# Altium PCB Marvin_PCB_V2.PcbDoc
Units mm, origin at the board's own origin, x right, y up, seen from the top; angles counter-clockwise.
Board outline 72 x 82 mm, 2 copper layers (Top Layer, Bottom Layer); 41 components, 30 nets, 134 pads, 45 vias.
Unrouted connection lines stored in the file: 2.
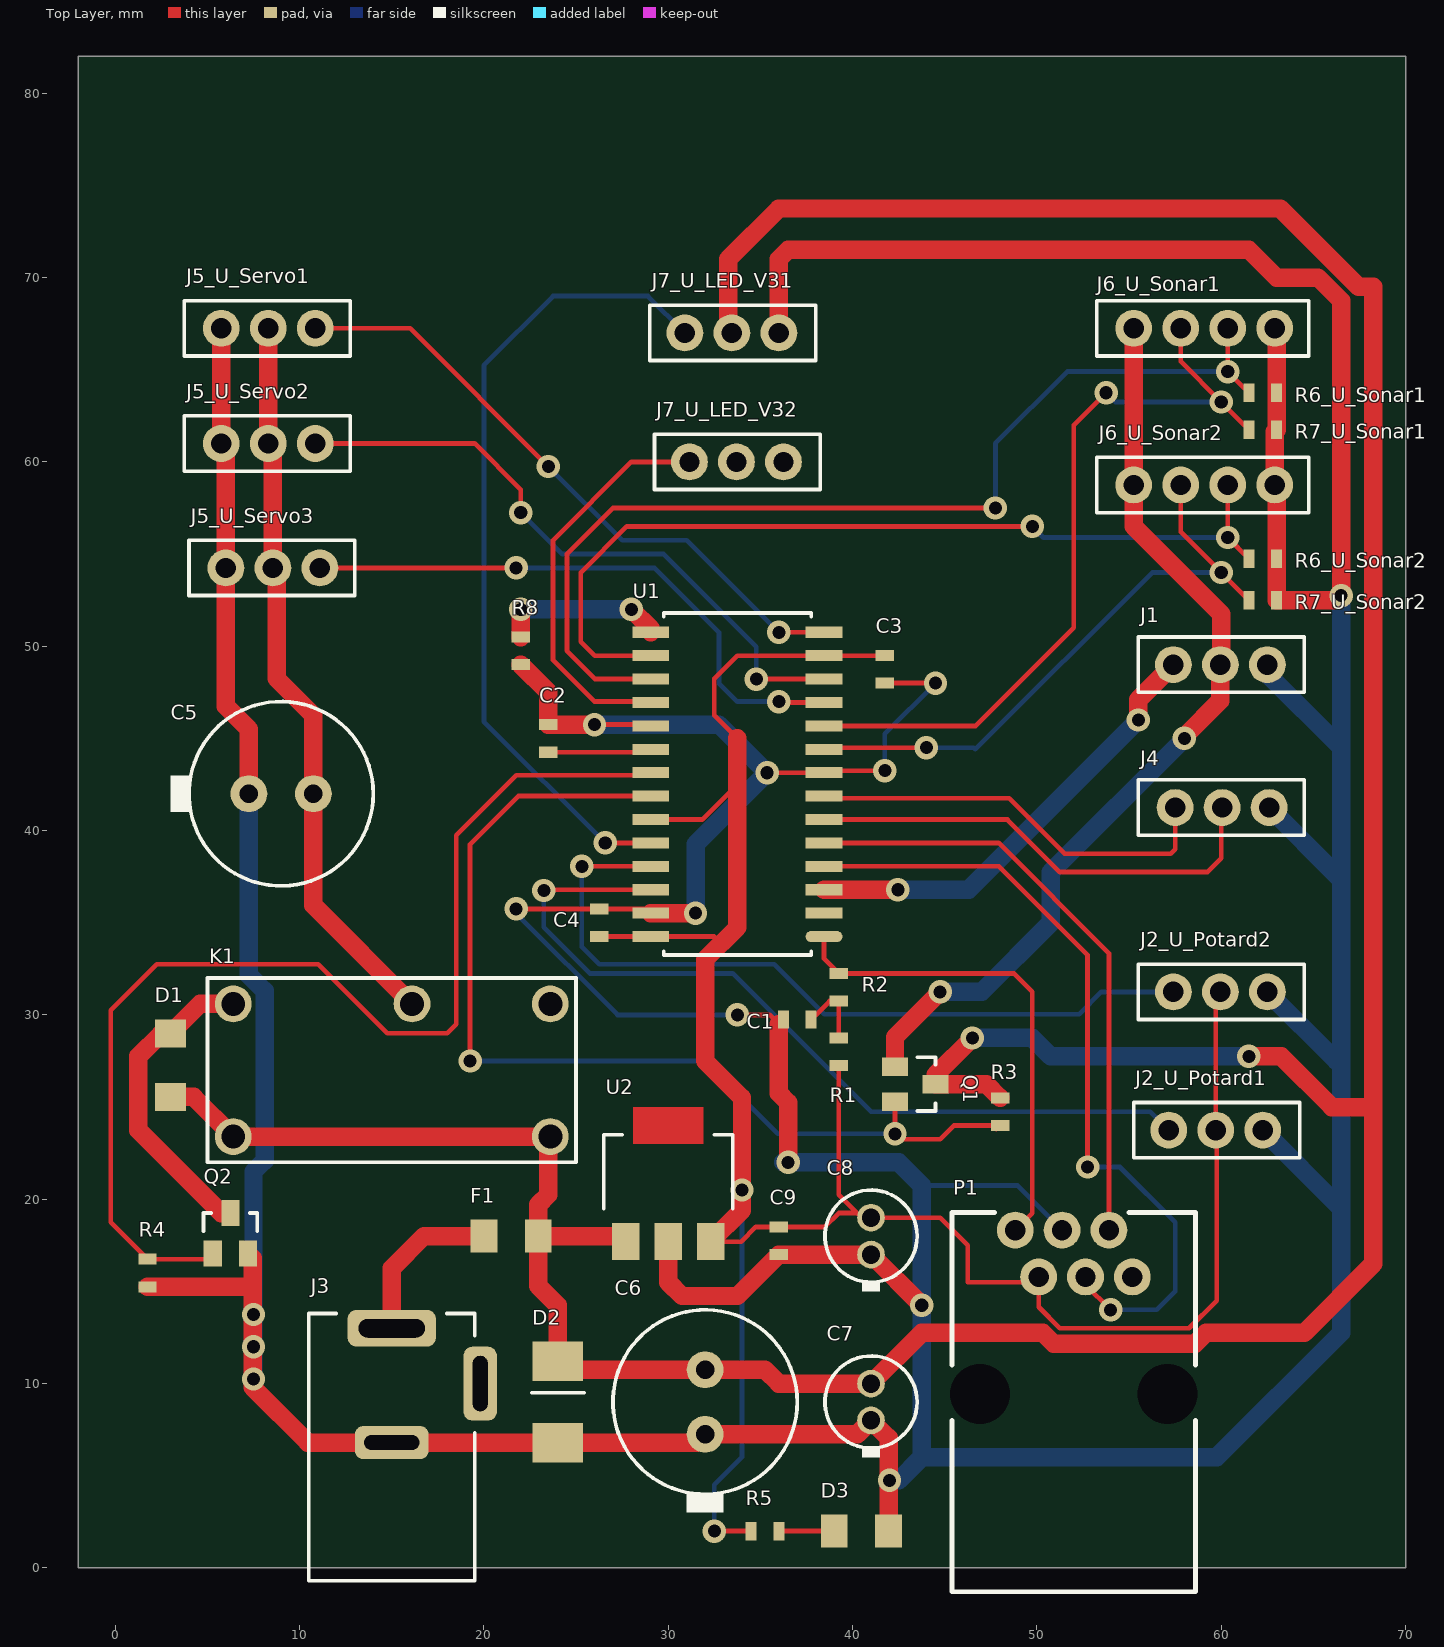
[diagram p0: Top Layer view]
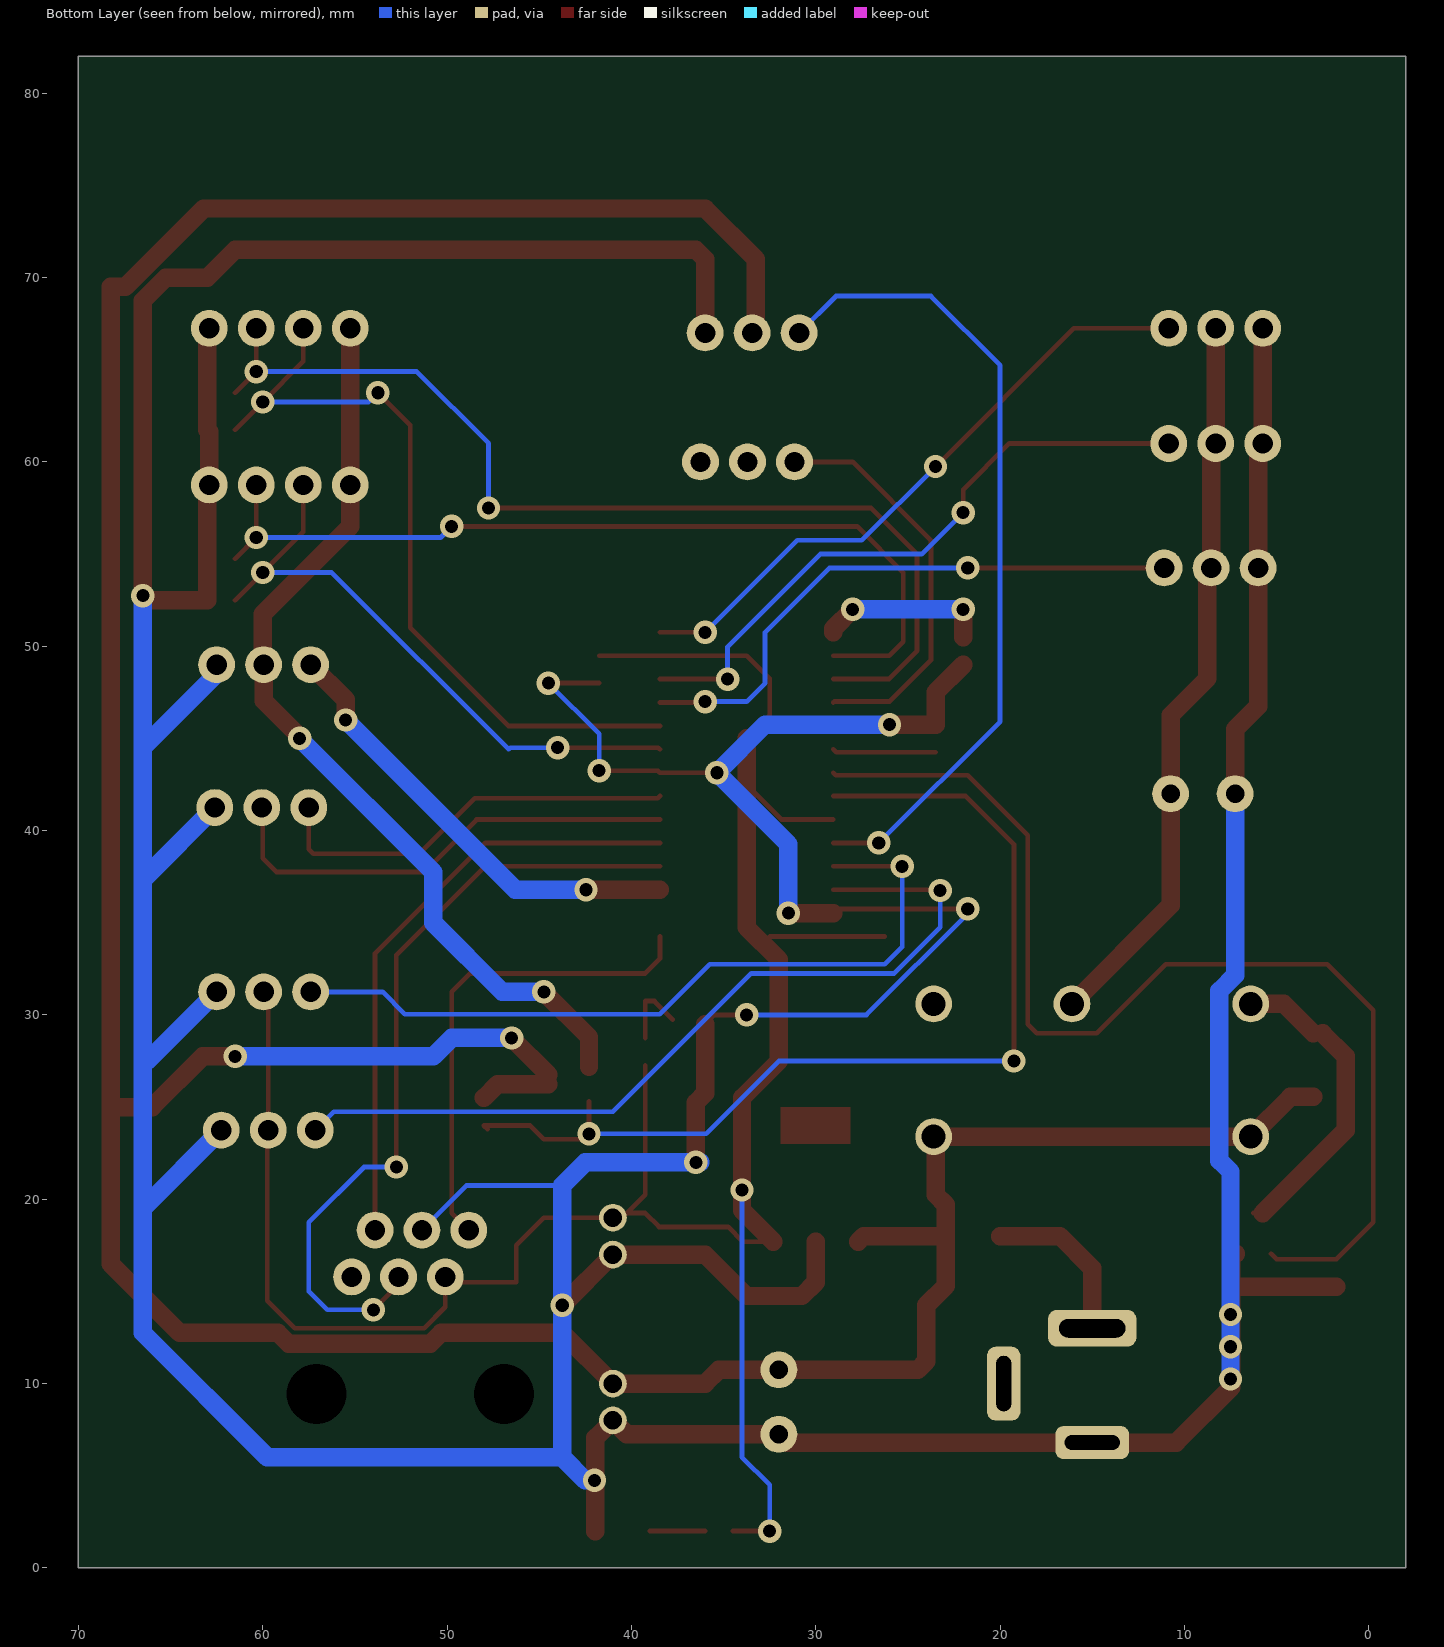
[diagram p1: Bottom Layer view, seen from below]

## Layer stack, top to bottom
Top Solder: solder mask 0.0102, Solder Resist, Dk 3.5
Top Layer: signal copper 0.0356
Dielectric 1: dielectric 0.32, FR-4, Dk 4.8
Bottom Layer: signal copper 0.0356
Bottom Solder: solder mask 0.0102, Solder Resist, Dk 3.5

## Board outline
-2,0 -2,82 70,82 70,0

## Design rules (kind name [scope] priority, off if disabled: settings)
Clearance [All] p1: gap=0.2
HoleSize [All] p1: absolutevalues=TRUE maxlimit=5 minlimit=0.3 maxpercent=80.000 minpercent=20.000
PolygonConnect [All] p1: connectstyle=Relief reliefconductorwidth=0.254 reliefentries=4 polygonreliefangle="90 Angle" airgapwidth=0.254
RoutingVias [All] p1: holewidth=0.3 width=0.7 viastyle="Through Hole" minholewidth=0.3 minwidth=0.7 maxholewidth=1 maxwidth=1.2
SolderMaskExpansion [All] p1: expansion=0.102
UnpouredPolygon [All] p1: allowunpoured=FALSE
Width [All] p1: maxlimit=5 minlimit=0.2 preferedwidth=0.2
28 further rules are at their usual default settings.

## Classes and differential pairs
channel class Sonar: U_Sonar1 U_Sonar2
channel class Servo: U_Servo1 U_Servo2 U_Servo3
channel class Potard: U_Potard1 U_Potard2
channel class LED_V3: U_LED_V31 U_LED_V32
component class U_Sonar2: J6_U_Sonar2 R6_U_Sonar2 R7_U_Sonar2
component class U_Sonar1: J6_U_Sonar1 R6_U_Sonar1 R7_U_Sonar1
component class U_Servo3: J5_U_Servo3
component class U_Servo2: J5_U_Servo2
component class U_Servo1: J5_U_Servo1
component class U_RPI: J4
component class U_Regul: C6 C7 C8 C9 D2 D3 F1 J3 R5 U2
component class U_Power_v2: C5 D1 K1 Q1 Q2 R3 R4
component class U_Potard2: J2_U_Potard2
component class U_Potard1: J2_U_Potard1
component class U_PIC: C1 C2 C3 C4 P1 R1 R2 R8 U1
component class U_LED_V32: J7_U_LED_V32
component class U_LED_V31: J7_U_LED_V31
component class U_IrSensor: J1

## Components (designator, comment, footprint, x,y, rotation, side; value= is the part's Value field where it differs from the comment)
C1 "100nF" "1608 / 0603" 36.25,29.75 r0 top
C2 "10uF" "1608 / 0603" 23.5,45.75 r270 top
C3 "100nF" "1608 / 0603" 41.75,48 r90 top
C4 "100nF" "1608 / 0603" 26.25,35.75 r270 top
C5 "470uF" CONDO_D_10mm 9,42 r270 top
C6 "470uF" CONDO_D_10mm 32,9 r0 top
C7 "10uF" CONDO_D_5MM 41,9 r0 top
C8 "10uF" CONDO_D_5MM 41,18 r0 top
C9 "Cap" "1608 / 0603" 36,17 r90 top
D1 "Diode GF1A" SMA/DO-214AC_21 3,29 r270 top
D2 "D Zener 1N5338BRLG" "DIODE ZENER" 24,9 r90 top
D3 "*" "3216 / 1206" 39,2 r0 top
F1 "MCPFP 5A 125V" "3216 / 1206" 20,18 r0 top
J1 "IR_Connector" "IR SENSOR CONNECTOR" 62.5,49 r180 top
J2_U_Potard1 "Potard_Connector" "POTARD CONNECTOR" 62.25,23.75 r180 top (schematic designator J2)
J2_U_Potard2 "Potard_Connector" "POTARD CONNECTOR" 62.5,31.25 r180 top (schematic designator J2)
J3 "PWR2.5" RAPC712BK 15,13 r0 top
J4 "RPi_Connector" "RPI CONNECTOR" 57.5,41.25 r0 top
J5_U_Servo1 "Servo_Connector" "SERVO CONNECTOR" 5.75,67.25 r0 top (schematic designator J5)
J5_U_Servo2 "Servo_Connector" "SERVO CONNECTOR" 5.75,61 r0 top (schematic designator J5)
J5_U_Servo3 "Servo_Connector" "SERVO CONNECTOR" 6,54.25 r0 top (schematic designator J5)
J6_U_Sonar1 "Sonar_Connector" "SONAR CONNECTOR" 55.25,67.25 r0 top (schematic designator J6)
J6_U_Sonar2 "Sonar_Connector" "SONAR CONNECTOR" 55.25,58.75 r0 top (schematic designator J6)
J7_U_LED_V31 "Leds_Connector" "LEDS CONNECTOR" 36,67 r180 top (schematic designator J7)
J7_U_LED_V32 "Leds_Connector" "LEDS CONNECTOR" 36.25,60 r180 top (schematic designator J7)
K1 "Relay-SPDT G5V-1" PE014005 15,27 r0 top
P1 "" RJ11 52,9 r180 top
Q1 "MOSFET-P ZVP2106A" SOT23 44.5,26.25 r270 top
Q2 "MOSFET-N 2N7002K" SOT23 6.25,19.25 r0 top
R1 "10K" "1608 / 0603" 39.25,28.75 r270 top
R2 "1K" "1608 / 0603" 39.25,30.75 r90 top
R3 "1K" "1608 / 0603" 48,24 r90 top
R4 "1K" "1608 / 0603" 1.75,15.25 r90 top
R5 "1K" "1608 / 0603" 36,2 r180 top
R6_U_Sonar1 "1K" "1608 / 0603" 63,63.75 r180 top (schematic designator R6)
R6_U_Sonar2 "1K" "1608 / 0603" 63,54.75 r180 top (schematic designator R6)
R7_U_Sonar1 "1K" "1608 / 0603" 63,61.75 r180 top (schematic designator R7)
R7_U_Sonar2 "1K" "1608 / 0603" 63,52.5 r180 top (schematic designator R7)
R8 "10K" "1608 / 0603" 22,49 r90 top
U1 "PIC32MX270F256B" SOIC28 33.25,43.75 r90 top
U2 "Regul LD1117S33TR" SOT-223 30,24 r0 top

## Footprints (in the part's own frame and the unit in brackets; to place one, negate y for a bottom-side part, rotate by r counter-clockwise, add the part's x,y. Pads: shape width x height; smd on the part's side, far side on the other; paste and mask are expansions set on the pad)
"1608 / 0603" [mm] "0603"
  rect 0.6x1 smd mask+0.2: 1(0,0) 2(1.5,0)
"3216 / 1206" [mm]
  rect 1.45x1.8 smd mask+0.2: 1(0,0) 2(2.95,0)
CONDO_D_5MM [mm]
  round 1.5 hole 1 mask+0.2: 1(0,-1) 2(0,1)
  silkscreen extent -2.5,-3 2.5,2.5
CONDO_D_10mm [mm]
  round 2 hole 1 mask+0.2: 1(0,-1.75) 2(0,1.75)
  silkscreen extent -5,-6 5,5
"DIODE ZENER" [mm]
  rect 2.159x2.743 smd mask+0.2: 1(-2.21,0) 2(2.21,0)
  silkscreen extent 0.51,-1.45 0.51,1.4
"IR SENSOR CONNECTOR" [mm]
  round 2 hole 1.1 mask+0.2: 1(0,0) 2(2.55,0) 3(5.1,0)
  silkscreen extent -2,-1.5 7,1.5
"LEDS CONNECTOR" [mm]
  round 2 hole 1.1 mask+0.2: 1(0,0) 2(2.55,0) 3(5.1,0)
  silkscreen extent -2,-1.5 7,1.5
PE014005 [mm] "RELAIS PE014005"
  round 2 hole 1.3 mask+0.2: 11(1.1,3.6) 12(8.6,-3.6) 14(8.6,3.6) A1(-8.6,3.6) A2(-8.6,-3.6)
  silkscreen extent -10,-5 10,5
"POTARD CONNECTOR" [mm]
  round 2 hole 1.1 mask+0.2: 1(0,0) 2(2.55,0) 3(5.1,0)
  silkscreen extent -2,-1.5 7,1.5
RAPC712BK [mm] "PRISE JACK RAPC712BK"
  rrect50% 4.8x2 hole 1 slot 3.6 at 0 deg mask+0.2: 1(0,0)
  rrect50% 4x1.8 hole 0.8 slot 3 at 0 deg mask+0.2: 2(0,-6.2)
  rrect50% 1.8x4 hole 0.8 slot 3 at 90 deg mask+0.2: 3(4.8,-3)
  silkscreen extent -4.5,-13.7 4.5,0.8
RJ11 [mm]
  round 2 hole 1.1 mask+0.2: 1(3.175,-9.325) 2(1.905,-6.785) 3(0.635,-9.325) 4(-0.635,-6.785)
  round 2 hole 1.1 unplated mask+0.2: 5(-1.905,-9.325) 6(-3.175,-6.785)
  round 1.524 hole 3.25 unplated mask+0.2: ""(-5.08,-0.435) ""(5.08,-0.435)
  silkscreen extent -6.61,-10.29 6.61,10.29
"RPI CONNECTOR" [mm]
  round 2 hole 1.1 mask+0.2: 1(0,0) 2(2.55,0) 3(5.1,0)
  silkscreen extent -2,-1.5 7,1.5
"SERVO CONNECTOR" [mm]
  round 2 hole 1.1 mask+0.2: 1(0,0) 2(2.55,0) 3(5.1,0)
  silkscreen extent -2,-1.5 7,1.5
SMA/DO-214AC_21 [mm]
  rect 1.52x1.68 smd mask+0.2: 1(0,0) 2(3.45,0)
SOIC28 [mm] "PIC32MX270F256B"
  oval 0.6x2 smd mask+0.2: 1(-9.5,-5.2)
  rect 0.6x2 smd mask+0.2: 2(-8.23,-5.2) 3(-6.96,-5.2) 4(-5.69,-5.2) 5(-4.42,-5.2) 6(-3.15,-5.2) 7(-1.88,-5.2) 8(-0.61,-5.2) 9(0.66,-5.2) 10(1.93,-5.2) 11(3.2,-5.2) 12(4.47,-5.2) 13(5.74,-5.2) 14(7.01,-5.2) 15(7.01,4.2) 16(5.74,4.2) 17(4.47,4.2) 18(3.2,4.2) 19(1.93,4.2) 20(0.66,4.2) 21(-0.61,4.2) 22(-1.88,4.2) 23(-3.15,4.2) 24(-4.42,4.2) 25(-5.69,4.2) 26(-6.96,4.2) 27(-8.23,4.2) 28(-9.5,4.2)
  silkscreen extent -10.5,-4.5 8.05,3.5
"SONAR CONNECTOR" [mm]
  round 2 hole 1.1 mask+0.2: 1(0,0) 2(2.55,0) 3(5.1,0) 4(7.65,0)
  silkscreen extent -2,-1.5 9.5,1.5
SOT23 [mm] "MOSFET N 2N7002K"
  rect 1x1.4 smd mask+0.2: 1(-0.95,-2.2) 2(0.95,-2.2) 3(0,0)
  silkscreen extent -1.46,-0.97 1.46,0
SOT-223 [mm] "LD1117S33TR"
  rect 1.5x2 smd mask+0.2: 1(-2.3,-6.3) 2(0,-6.3) 3(2.3,-6.3)
  Top Layer region: -1.9,-1 1.9,-1 1.9,1 -1.9,1
  silkscreen extent -3.5,-4.5 3.5,-0.5

## Part data
C1 C2 C3 C4 C5 C6 C7 C8: library part Cap, "Capacitor"
C9: "Capacitor"
D1: library part Diode, "Default Diode"
D2: library part "D Zener", "Zener Diode"
D3: library part LED0, "Typical INFRARED GaAs LED"
F1: library part "Fuse 1", "Fuse"
J3: "Low Voltage Power Supply Connector"
K1: library part Relay-SPDT, "Single-Pole Dual-Throw Relay"
P1: library part "Header 6", "Header, 6-Pin"
Q1: library part MOSFET-P, "P-Channel MOSFET"
Q2: library part MOSFET-N, "N-Channel MOSFET"
R1 R2 R3 R4 R5 R6_U_Sonar1 R6_U_Sonar2 R7_U_Sonar1 R7_U_Sonar2 R8: library part Res1, "Resistor"
U2: library part "Volt Reg", "Voltage Regulator"

## Via types
v1: diameter 1.27, hole 0.711, Top Layer to Bottom Layer, 45 vias

## Nets (pads, with @x,y where several pads share a name; then routed paths per layer and width w, separated by ;. In a path a pad name is that pad's centre, name@x,y a point inside that pad or via, vN(x,y) a via of type N, cw(c..) or ccw(c..) an arc to the next point about the centre after c; other vN are vias at no path point)
3V3MAIN: C3.2 C4.2 C8.2 C9.2 J2_U_Potard1.2 J2_U_Potard2.2 P1.2 R1.2 R5.2 U1.13 U1.23 U1.28 U2.3 | length 135
  Top Layer w0.258: C4.2 U1.28 32.5,34.25 ; U1.23 31.85,40.6 33.75,42.5 ; U2.3 33.95,17.7 34.75,18.5 C9.2 38.5,18.5 39.25,19.25 40.25,19.25 ; v1(32.5,2) R5.2 ; 33.75,45 32.5,46.25 32.5,48.25 33.74,49.49 U1.13 C3.2@41.74,49.49 ; R1.2 39.25,20.25 40.25,19.25 ; J2_U_Potard1.2@59.95,23.25 J2_U_Potard1.2@60,23.2 ; J2_U_Potard2.2 59.7,31 J2_U_Potard1.2 59.75,23.7 59.75,14.5 58.25,13 51.25,13 50.095,14.155 P1.2 49.81,15.5 46.25,15.5 46.25,17.5 44.75,19 C8.2 40.5,19 40.25,19.25
  Top Layer w1: U2.3 34,19.4 v1(34,20.5) 34,25.5 32,27.5 32,33 33.75,34.75 33.75,42.5 33.75,45
  Bottom Layer w0.258: v1(32.5,2) 32.5,4.5 34,6 v1(34,20.5)
5VIN: F1.1 J3.1 | length 10
  Top Layer w0.254: J3.1 J3.1@15.75,13.75
  Top Layer w1: J3.1 15,16.25 16.75,18 F1.1
5VMAIN: C6.2 C7.2 D1.2 D2.2 F1.2 J7_U_LED_V31.2 J7_U_LED_V32.2 K1.12 K1.A2 Q1.3 R3.2 U2.1 | length 213.2
  Top Layer w0.258: D1.2 D1.2@3.25,25.3 ; Q1.3 Q1.3@44.5,26.75 ; v1(46.5,28.75) v1@47,28.75
  Top Layer w1: D1.2 4.25,25.55 K1.A2 K1.12 23.5,23.3 23.5,20.25 22.95,19.7 F1.2 ; U2.1 27.4,18 F1.2 ; J7_U_LED_V31.2@33.25,67.2 33.25,71 36,73.75 63.197,73.75 67.447,69.5 68.25,69.5 68.25,25 ; Q1.3 47.25,26.25 R3.2 ; Q1.3@44.5,26.75 v1(46.5,28.75) ; v1(61.5,27.75) 63.25,27.75 66,25 68.25,25 ; F1.2 22.95,15.3 24,14.25 D2.2 24.46,10.75 C6.2 35.25,10.75 36,10 C7.2 43.75,12.75 50.328,12.75 50.907,12.171 58.593,12.171 59.172,12.75 64.5,12.75 68.25,16.5 68.25,25
  Bottom Layer w1: v1(46.5,28.75) 49.75,28.75 50.75,27.75 v1(61.5,27.75)
GND: C1.1 C2.1 C3.1 C4.1 C5.1 C6.1 C7.1 C8.1 C9.1 D2.1 D3.2 J1.1 J2_U_Potard1.1 J2_U_Potard2.1 J3.2 J4.3 J5_U_Servo1.1 J5_U_Servo2.1 J5_U_Servo3.1 J6_U_Sonar1.4 J6_U_Sonar2.4 J7_U_LED_V31.1 J7_U_LED_V32.1 P1.3 Q2.2 R4.1 R6_U_Sonar1.1 R6_U_Sonar2.1 R7_U_Sonar1.1 R7_U_Sonar2.1 R8.1 U1.8 U1.19 U1.27 U2.2 | length 403.3
  Top Layer w0.258: v1(21.75,35.75) C4.1 28.82,35.75 U1.27 ; v1(26,45.75) 28.98,45.75 U1.19 ; v1@33.75,30.25 v1(33.75,30) 35.5,30 C1.1@36,29.5 ; v1(35.36,43.14) U1.8 38.56,43.25 v1(41.75,43.25) ; C3.1 v1(44.5,48) ; J2_U_Potard1.1 J2_U_Potard1.1@62.5,24 ; J2_U_Potard2.1 J2_U_Potard2.1@62.6,31.35 ; J4.3@62.5,41.35 J4.3 ; J6_U_Sonar2.4 J6_U_Sonar2.4@63,58.65 ; R7_U_Sonar1.1@62.9,61.65 R7_U_Sonar1.1 ; J6_U_Sonar1.4 J6_U_Sonar1.4@63,67.15 ; v1@66.25,52.5 v1(66.5,52.75)
  Top Layer w1: R4.1 7.45,15.25 ; J5_U_Servo1.1 J5_U_Servo2.1 6,60.75 J5_U_Servo3.1 6,46.75 7.25,45.5 C5.1 ; Q2.2 7.45,16.8 7.45,15.25 ; R8.1 23.5,47.5 C2.1 v1(26,45.75) ; U1.27 v1(31.48,35.52) ; U2.2 30,15.5 30.75,14.75 33.75,14.75 C9.1 C8.1 v1(43.75,14.25) ; C1.1@36,29.5 36,25.75 36.5,25.25 v1(36.5,22) ; J7_U_LED_V31.1 36,71 36.5,71.5 61.5,71.5 63,70 65.25,70 66.5,68.75 v1(66.5,52.75) ; D3.2 41.95,7.05 C7.1 40.25,7.25 C6.1 31.54,6.79 D2.1 23.99,6.8 J3.2 10.45,6.8 7.45,9.8 7.45,15.25 ; J6_U_Sonar2.4 R7_U_Sonar1.1@62.9,61.65 ; J6_U_Sonar2.4@63,58.65 R6_U_Sonar2.1 R7_U_Sonar2.1 v1@66.25,52.5 ; R7_U_Sonar1.1 R6_U_Sonar1.1 J6_U_Sonar1.4@63,67.15
  Bottom Layer w0.258: v1(21.75,35.75) 21.75,35.5 27.25,30 v1(33.75,30) ; v1(41.75,43.25) 41.75,45.25 v1(44.5,48) ; 43.75,20.75 48.94,20.75 P1.3 ; J1.1@62.5,48.5 J1.1 ; 66.25,27.5 66.5,27.5 ; 66.35,37.5 66.5,37.5
  Bottom Layer w1: C5.1 7.25,32.154 8.1,31.304 8.1,22.1 7.5,21.5 v1@7.5,10.5 ; v1(26,45.75) 32.75,45.75 v1(35.36,43.14) 31.48,39.26 v1(31.48,35.52) ; v1@36.25,22 v1(36.5,22) 42.5,22 43.75,20.75 v1(43.75,14.25) 43.75,6 ; v1(42,4.75) 42.5,4.75 43.75,6 ; J2_U_Potard1.1 66.5,19.5 ; J2_U_Potard2.1 66.25,27.5 ; J1.1@62.5,48.5 66.5,44.5 ; J4.3 66.35,37.5 ; v1(66.5,52.75) 66.5,44.5 ; 43.75,6 59.75,6 66.5,12.75 66.5,19.5 ; 66.5,19.5 66.5,27.5 66.5,37.5 66.5,44.5
  other v1: 7.5,10.25 7.5,12 7.5,13.75
MCLR: P1.1 R2.2 U1.1 | length 26.6
  Top Layer w0.258: U1.1 38.45,33.05 R2.2 48.75,32.25 49.75,31.25 49.75,19.25 P1.1
NetC1_2: C1.2 R1.1 R2.1 | length 3.9
  Top Layer w0.258: C1.2 38.75,30.75 R2.1 R1.1
NetC2_2: C2.2 U1.20 | length 5.6
  Top Layer w0.258: C2.2 28.89,44.25 U1.20
NetD1_1: D1.1 K1.A1 Q2.3 | length 17.2
  Top Layer w0.258: D1.1@2.5,29 D1.1 ; Q2.3@5.75,19.25 Q2.3
  Top Layer w1: D1.1@2.5,29 1.25,27.75 1.25,23.75 Q2.3@5.75,19.25 ; D1.1 4.6,30.6 K1.A1
NetD3_1: D3.1 R5.1 | length 3
  Top Layer w0.258: R5.1 D3.1
NetJ1_3: J1.3 U1.3 | length 24.7
  Top Layer w0.258: v1(42.46,36.79) v1@42.5,36.75
  Top Layer w1: U1.3 v1(42.46,36.79) ; v1(55.5,46) 55.5,47.1 J1.3
  Bottom Layer w1: v1(42.46,36.79) 46.29,36.79 v1(55.5,46)
NetJ2_U_Potard1_3: J2_U_Potard1.3 U1.26 | length 46.3
  Top Layer w0.258: v1(23.25,36.75) 23.29,36.79 U1.26
  Bottom Layer w0.258: v1(23.25,36.75) 23.25,34.75 25.75,32.25 33.5,32.25 41,24.75 56.15,24.75 J2_U_Potard1.3
NetJ2_U_Potard2_3: J2_U_Potard2.3 U1.25 | length 42.2
  Top Layer w0.258: v1(25.31,38.06) U1.25
  Bottom Layer w0.258: v1(25.31,38.06) 25.31,33.69 26.25,32.75 35.75,32.75 38.464,30.036 52.286,30.036 53.5,31.25 J2_U_Potard2.3
NetJ4_1: J4.1 U1.7 | length 22.7
  Top Layer w0.258: U1.7 38.57,41.75 48.5,41.75 51.5,38.75 57.25,38.75 57.5,39 J4.1
NetJ4_2: J4.2 U1.6 | length 25.8
  Top Layer w0.258: U1.6 48.4,40.6 51.25,37.75 59.25,37.75 60,38.5 60,41.2 J4.2
NetJ5_U_Servo1_3: J5_U_Servo1.3 U1.14 | length 34.2
  Top Layer w0.258: J5_U_Servo1.3 16,67.25 v1(23.5,59.75) ; v1@36.25,50.75 36.26,50.76 U1.14
  Bottom Layer w0.258: v1(23.5,59.75) 27.5,55.75 31,55.75 v1(36,50.75)
NetJ5_U_Servo2_3: J5_U_Servo2.3 U1.12 | length 34.7
  Top Layer w0.258: J5_U_Servo2.3 19.5,61 22,58.5 v1(22,57.25) ; v1@34.75,48.25 v1(34.78,48.22) U1.12
  Bottom Layer w0.258: v1(22,57.25) 24.25,55 29.75,55 34.78,49.97 v1(34.78,48.22)
NetJ5_U_Servo3_3: J5_U_Servo3.3 U1.11 | length 32
  Top Layer w0.258: J5_U_Servo3.3 v1(21.75,54.25) ; v1(36,47) 36.05,46.95 U1.11
  Bottom Layer w0.258: v1(21.75,54.25) 29.25,54.25 32.75,50.75 32.75,48 33.75,47 v1(36,47)
NetJ6_U_Sonar1_2: J6_U_Sonar1.2 R7_U_Sonar1.2 U1.10 | length 42
  Top Layer w0.258: U1.10 46.68,45.68 52,51 52,62 v1(53.75,63.75) ; J6_U_Sonar1.2 57.8,65.45 v1(60,63.25) R7_U_Sonar1.2
  Bottom Layer w0.258: 54.25,63.25 v1(60,63.25)
NetJ6_U_Sonar1_3: J6_U_Sonar1.3 R6_U_Sonar1.2 U1.17 | length 56.4
  Top Layer w0.258: U1.17 26.03,48.22 24.5,49.75 24.5,55 27,57.5 v1(47.75,57.5) ; J6_U_Sonar1.3 v1(60.35,64.9) R6_U_Sonar1.2
  Bottom Layer w0.258: v1(47.75,57.5) 47.75,61 51.65,64.9 v1(60.35,64.9)
NetJ6_U_Sonar2_2: J6_U_Sonar2.2 R7_U_Sonar2.2 U1.9 | length 33.4
  Top Layer w0.258: U1.9 38.54,44.5 v1(44,44.5) ; J6_U_Sonar2.2 57.8,56.2 R7_U_Sonar2.2
  Bottom Layer w0.258: v1(44,44.5) 46.57,44.5 46.66,44.41 56.25,54 v1(60,54)
NetJ6_U_Sonar2_3: J6_U_Sonar2.3 R6_U_Sonar2.2 U1.16 | length 48.7
  Top Layer w0.258: U1.16 26.01,49.49 25.25,50.25 25.25,54 27.75,56.5 v1(49.75,56.5) ; J6_U_Sonar2.3 v1(60.35,55.9) R6_U_Sonar2.2
  Bottom Layer w0.258: v1(49.75,56.5) 50.35,55.9 v1(60.35,55.9)
NetJ7_U_LED_V31_3: J7_U_LED_V31.3 U1.24 | length 44.4
  Top Layer w0.258: v1(26.58,39.33) U1.24
  Bottom Layer w0.258: v1(26.58,39.33) 20,45.91 20,65.25 23.75,69 28.9,69 J7_U_LED_V31.3
NetJ7_U_LED_V32_3: J7_U_LED_V32.3 U1.18 | length 21.9
  Top Layer w0.258: U1.18 29,47 26,47 23.75,49.25 23.75,55.75 28,60 J7_U_LED_V32.3
NetQ1_2: Q1.2 R3.1 U1.22 | length 55.5
  Top Layer w0.258: v1(19.25,27.5) 19.25,39.25 21.87,41.87 U1.22 ; Q1.2 v1(42.3,23.55) 42.6,23.25 44.75,23.25 45.5,24 R3.1 R3.1@47.8,23.8
  Bottom Layer w0.258: v1(19.25,27.5) 32,27.5 35.95,23.55 v1(42.3,23.55)
NetQ2_1: Q2.1 R4.2 U1.21 | length 61.8
  Top Layer w0.258: Q2.1 5,16.75 R4.2 -0.25,18.75 -0.25,30.25 2.25,32.75 11,32.75 14.75,29 18,29 18.5,29.5 18.5,39.75 21.75,43 28.91,43 U1.21
PGEC: P1.5 U1.5 | length 33
  Top Layer w0.258: U1.5 47.92,39.33 53.905,33.345 P1.5
PGED: P1.4 U1.4 | length 44.2
  Top Layer w0.258: U1.4 47.94,38.06 52.75,33.25 v1(52.75,21.75) ; P1.4 52.635,15.365 v1(54,14)
  Bottom Layer w0.258: v1(52.75,21.75) 54.5,21.75 57.5,18.75 57.5,15 56.5,14 v1(54,14) v1@54.25,13.75
"SENSOR VCC": J1.2 J6_U_Sonar1.1 J6_U_Sonar2.1 Q1.1 | length 50.7
  Top Layer w0.258: J1.2 J1.2@60,49.05
  Top Layer w1: Q1.1 42.3,28.8 v1(44.75,31.25) ; J6_U_Sonar1.1 J6_U_Sonar2.1 55.25,56.5 60,51.75 J1.2@60,49.05 ; v1(58,45) 58,45.1 59.95,47.05 J1.2
  Bottom Layer w1: v1(44.75,31.25) 47,31.25 50.75,35 50.75,37.75 v1(58,45)
"SERVO VCC": C5.2 J5_U_Servo1.2 J5_U_Servo2.2 J5_U_Servo3.2 K1.11 | length 39.9
  Top Layer w1: J5_U_Servo1.2 J5_U_Servo2.2 8.55,60.75 J5_U_Servo3.2 8.75,54.05 8.75,48.25 10.75,46.25 C5.2 10.75,35.95 K1.11
VBUS: R8.2 U1.15 | length 9.2
  Top Layer w1: R8.2 v1(22,52) ; v1(28,52) 29.05,50.95 U1.15
  Bottom Layer w1: v1(22,52) v1(28,52)
pads on no net: J3.3 K1.14 P1. P1.6 U1.2

## Silkscreen, mask and mechanical layers (free items; w line width, h text height)
Board Outline:
  lines w0.2: 0,0 70,0
  lines w0.254: -2,0 0,0 70,0 70,82 -2,82 -2,0